# Altium PCB LC_S8.PcbDoc
Units mm, origin at the board's own origin, x right, y up, seen from the top; angles counter-clockwise.
Board outline 100 x 75 mm, 2 copper layers (F.Cu, B.Cu); 60 components, 58 nets, 170 pads, 4 vias.
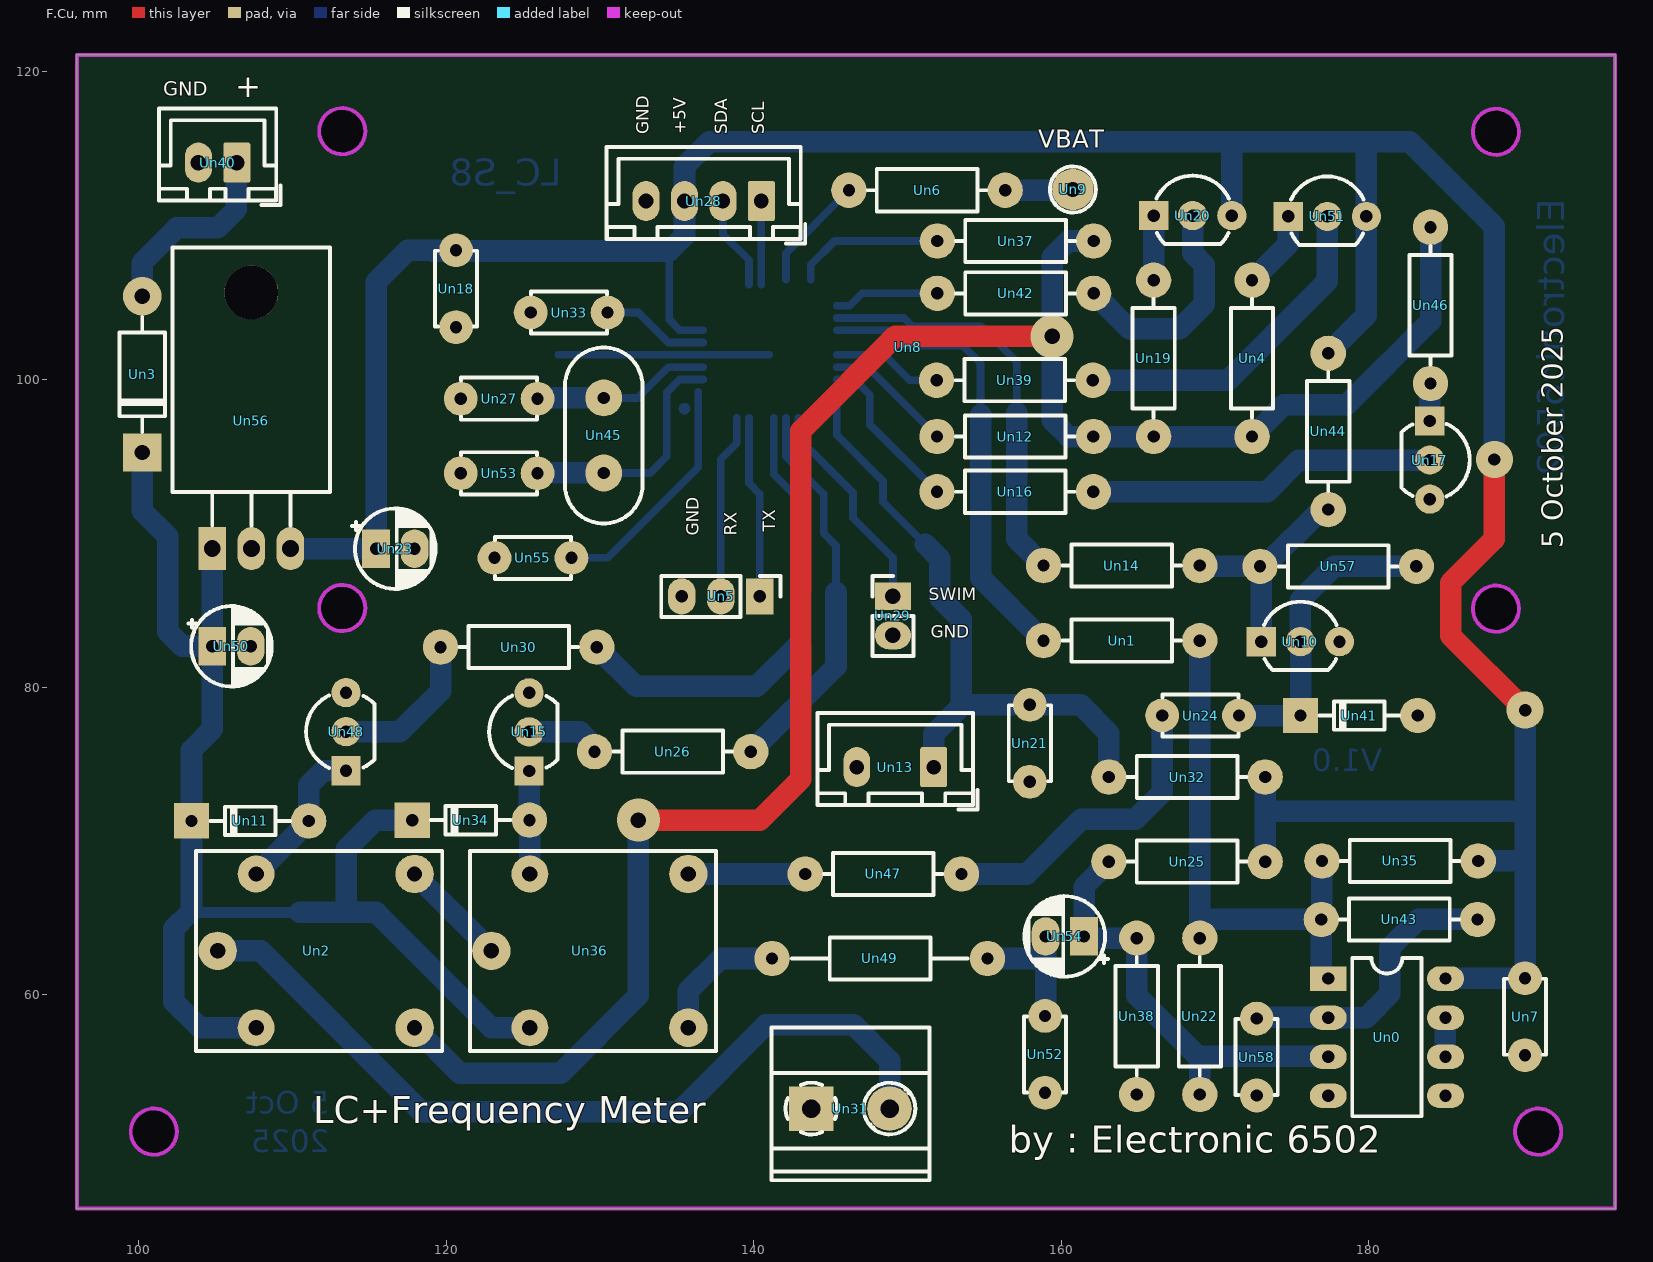
[diagram p0: F.Cu view]
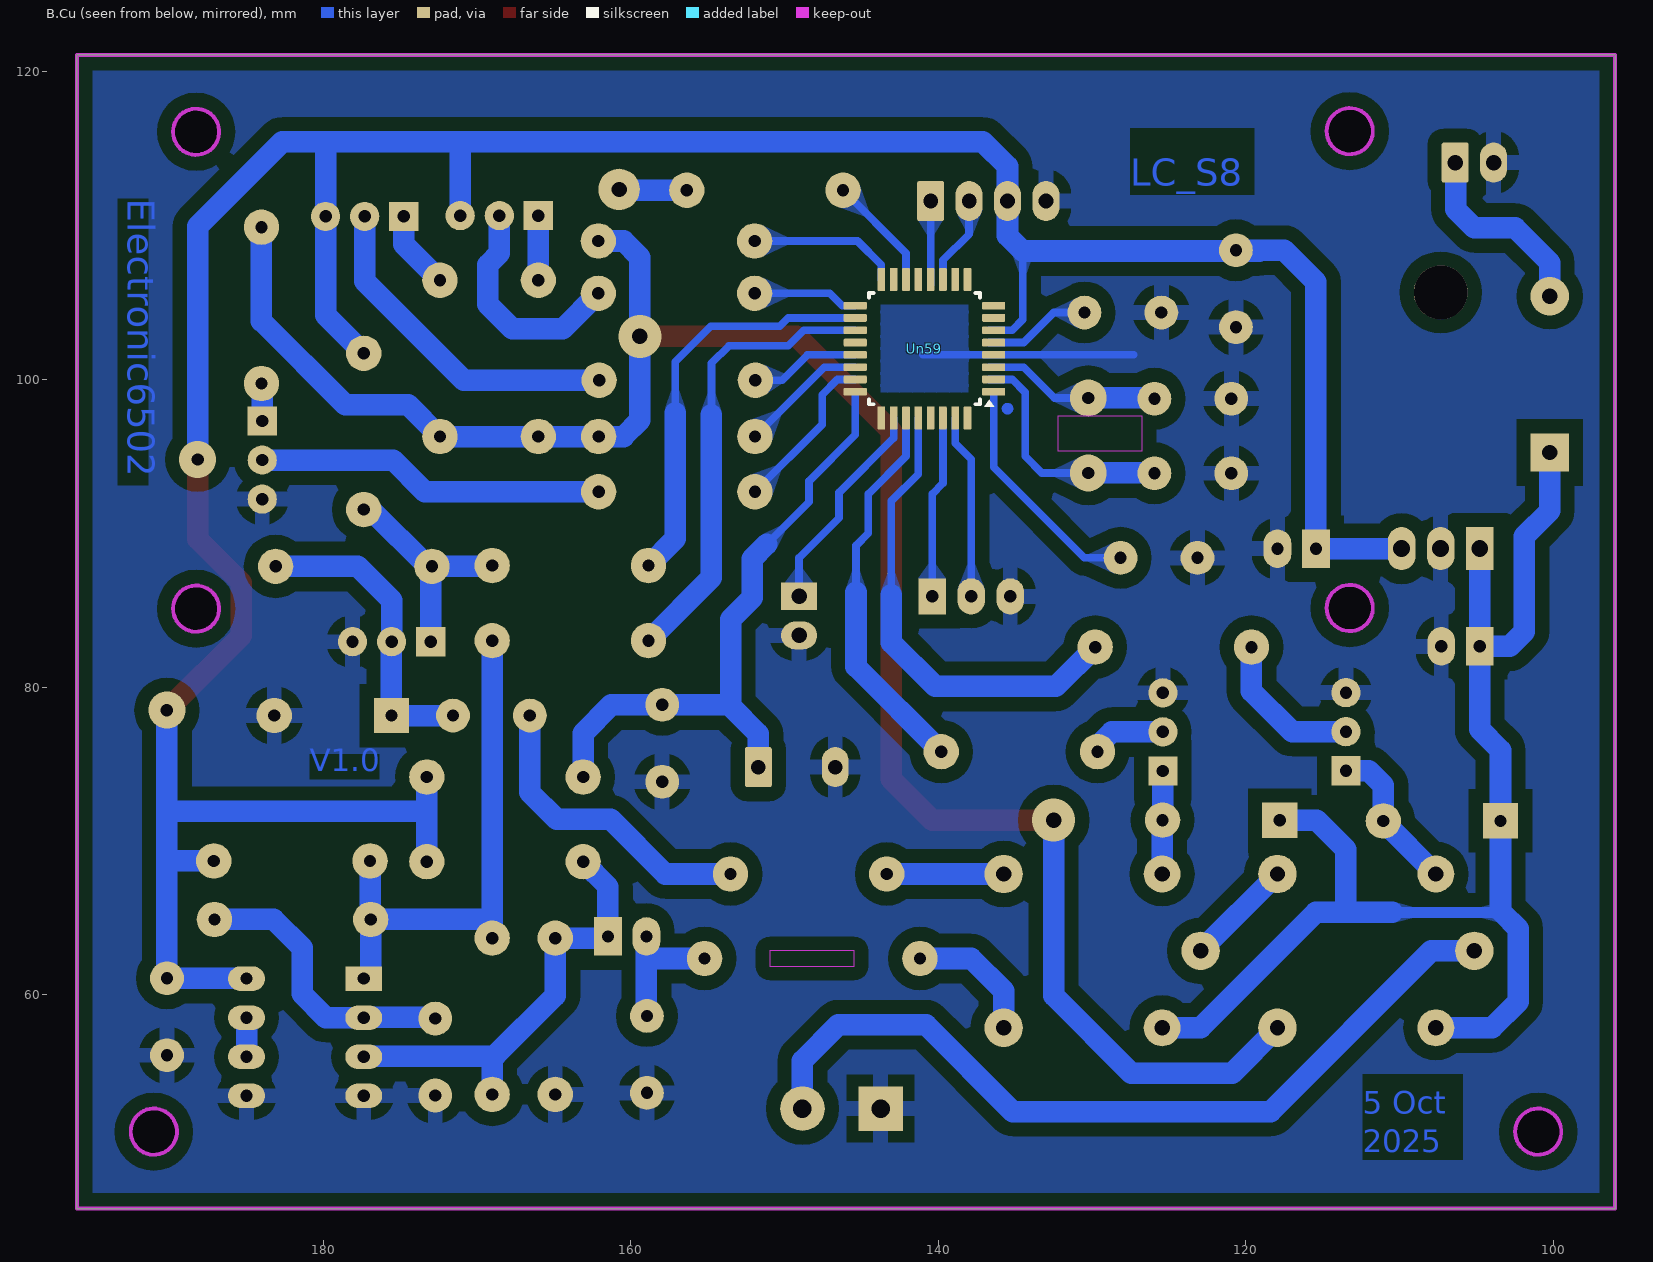
[diagram p1: B.Cu view, seen from below]

## Layer stack, top to bottom
F.Mask: solder mask 0.0102, Solder Resist, Dk 3.5
F.Cu: signal copper 0.0356
Dielectric 1: dielectric 0.32, FR-4, Dk 4.8
B.Cu: signal copper 0.0356
B.Mask: solder mask 0.0102, Solder Resist, Dk 3.5

## Board outline
96,121.1 96,46.1 196,46.1 196,121.1 96,121.1
cut-out: 101,49.593 101.294,49.622 101.577,49.707 101.837,49.847 102.066,50.034 102.253,50.263 102.393,50.523 102.478,50.806 102.507,51.1 102.478,51.394 102.393,51.677 102.253,51.937 102.066,52.166 101.837,52.353 101.577,52.493 101.294,52.578 101,52.607 100.706,52.578 100.423,52.493 100.163,52.353 99.934,52.166 99.747,51.937 99.607,51.677 99.522,51.394 99.493,51.1 99.522,50.806 99.607,50.523 99.747,50.263 99.934,50.034 100.163,49.847 100.423,49.707 100.706,49.622 101,49.593
cut-out: 114.558,115.406 114.643,115.564 114.729,115.847 114.758,116.141 114.729,116.436 114.643,116.718 114.504,116.979 114.316,117.208 114.088,117.395 113.985,117.45 113.827,117.534 113.544,117.62 113.25,117.649 112.956,117.62 112.673,117.534 112.412,117.395 112.184,117.208 111.996,116.979 111.942,116.877 111.857,116.718 111.771,116.436 111.742,116.141 111.771,115.847 111.857,115.564 111.996,115.304 112.184,115.075 112.412,114.888 112.515,114.833 112.673,114.748 112.956,114.663 113.25,114.634 113.544,114.663 113.827,114.748 114.088,114.888 114.316,115.075 114.504,115.304 114.558,115.406
cut-out: 191,49.593 191.294,49.622 191.577,49.707 191.837,49.847 192.066,50.034 192.253,50.263 192.393,50.523 192.478,50.806 192.507,51.1 192.478,51.394 192.393,51.677 192.253,51.937 192.066,52.166 191.837,52.353 191.577,52.493 191.294,52.578 191,52.607 190.706,52.578 190.423,52.493 190.163,52.353 189.934,52.166 189.747,51.937 189.607,51.677 189.522,51.394 189.493,51.1 189.522,50.806 189.607,50.523 189.747,50.263 189.934,50.034 190.163,49.847 190.423,49.707 190.706,49.622 191,49.593
cut-out: 189.558,84.365 189.643,84.523 189.728,84.806 189.757,85.1 189.728,85.394 189.643,85.677 189.503,85.937 189.316,86.166 189.087,86.353 188.985,86.408 188.827,86.493 188.544,86.578 188.25,86.607 187.956,86.578 187.673,86.493 187.413,86.353 187.184,86.166 186.997,85.937 186.942,85.835 186.857,85.677 186.772,85.394 186.743,85.1 186.772,84.806 186.857,84.523 186.997,84.263 187.184,84.034 187.413,83.847 187.515,83.792 187.673,83.707 187.956,83.622 188.25,83.593 188.544,83.622 188.827,83.707 189.087,83.847 189.316,84.034 189.503,84.263 189.558,84.365
cut-out: 189.558,115.365 189.643,115.523 189.728,115.806 189.757,116.1 189.728,116.394 189.643,116.677 189.503,116.937 189.316,117.166 189.087,117.353 188.985,117.408 188.827,117.493 188.544,117.578 188.25,117.607 187.956,117.578 187.673,117.493 187.413,117.353 187.184,117.166 186.997,116.937 186.942,116.835 186.857,116.677 186.772,116.394 186.743,116.1 186.772,115.806 186.857,115.523 186.997,115.263 187.184,115.034 187.413,114.847 187.515,114.792 187.673,114.707 187.956,114.622 188.25,114.593 188.544,114.622 188.827,114.707 189.087,114.847 189.316,115.034 189.503,115.263 189.558,115.365
cut-out: 114.558,84.406 114.643,84.564 114.729,84.847 114.758,85.141 114.729,85.436 114.643,85.718 114.504,85.979 114.316,86.208 114.088,86.395 113.985,86.45 113.827,86.534 113.544,86.62 113.25,86.649 112.956,86.62 112.673,86.534 112.412,86.395 112.184,86.208 111.996,85.979 111.942,85.877 111.857,85.718 111.771,85.436 111.742,85.141 111.771,84.847 111.857,84.564 111.996,84.304 112.184,84.075 112.412,83.888 112.515,83.833 112.673,83.748 112.956,83.663 113.25,83.634 113.544,83.663 113.827,83.748 114.088,83.888 114.316,84.075 114.504,84.304 114.558,84.406

## Design rules (kind name [scope] priority, off if disabled: settings)
Clearance "Clearence 0.9_Polygon" [InNamedPolygon('B.Cu-GND')] p1: gap=0.9 ignorepadtopadclearanceinfootprint=FALSE except(0: Fill-Text Poly-Text Region-Text)
ComponentClearance [All] p1: gap=0 collisioncheckmode=3 verticalgap=0 showdistances=FALSE
MinimumSolderMaskSliver [All] p1: minsoldermaskwidth=0
PolygonConnect Polygon_B.Cu-Net-(U2-PC7)-1_ConnectDirect [IsNamedPolygon('B.Cu-Net-(U2-PC7)-1')] p1: connectstyle=Direct reliefconductorwidth=0.254 reliefentries=4 polygonreliefangle="90 Angle" airgapwidth=0.254
PolygonConnect Polygon_B.Cu-GND_ConnectDirect [IsNamedPolygon('B.Cu-GND') vs IsVia] p2: connectstyle=Direct reliefconductorwidth=0.254 reliefentries=4 polygonreliefangle="90 Angle" airgapwidth=0.254
PolygonConnect Polygon_B.Cu-GND_ConnectRelief45 [IsNamedPolygon('B.Cu-GND') vs (IsThruPin or IsSMTPin) and (PadShape_AllLayers = 'Round')] p3: connectstyle=Relief reliefconductorwidth=1 reliefentries=4 polygonreliefangle="90 Angle" airgapwidth=0.75
PolygonConnect Polygon_B.Cu-GND_ConnectRelief90 [IsNamedPolygon('B.Cu-GND') vs (IsThruPin or IsSMTPin) and (PadShape_AllLayers <> 'Round')] p4: connectstyle=Relief reliefconductorwidth=1 reliefentries=4 polygonreliefangle="90 Angle" airgapwidth=0.75
PolygonConnect Polygon_B.Cu-Net-(U2-VCAP)_ConnectDirect [IsNamedPolygon('B.Cu-Net-(U2-VCAP)')] p5: connectstyle=Direct reliefconductorwidth=0.254 reliefentries=4 polygonreliefangle="90 Angle" airgapwidth=0.254
PolygonConnect Polygon_B.Cu-CAP_SLOW_CHG_ConnectDirect [IsNamedPolygon('B.Cu-CAP_SLOW_CHG')] p6: connectstyle=Direct reliefconductorwidth=0.254 reliefentries=4 polygonreliefangle="90 Angle" airgapwidth=0.254
PolygonConnect Polygon_B.Cu-+9V-5_ConnectDirect [IsNamedPolygon('B.Cu-+9V-5')] p7: connectstyle=Direct reliefconductorwidth=0.254 reliefentries=4 polygonreliefangle="90 Angle" airgapwidth=0.254
PolygonConnect Polygon_B.Cu-Cx_ADC_ConnectDirect [IsNamedPolygon('B.Cu-Cx_ADC')] p8: connectstyle=Direct reliefconductorwidth=0.254 reliefentries=4 polygonreliefangle="90 Angle" airgapwidth=0.254
PolygonConnect Polygon_B.Cu-RL1-1_ConnectDirect [IsNamedPolygon('B.Cu-RL1-1')] p9: connectstyle=Direct reliefconductorwidth=0.254 reliefentries=4 polygonreliefangle="90 Angle" airgapwidth=0.254
PolygonConnect Polygon_B.Cu-+9V-4_ConnectDirect [IsNamedPolygon('B.Cu-+9V-4')] p10: connectstyle=Direct reliefconductorwidth=0.254 reliefentries=4 polygonreliefangle="90 Angle" airgapwidth=0.254
PolygonConnect Polygon_B.Cu-Net-(U2-PA2)_ConnectDirect [IsNamedPolygon('B.Cu-Net-(U2-PA2)')] p11: connectstyle=Direct reliefconductorwidth=0.254 reliefentries=4 polygonreliefangle="90 Angle" airgapwidth=0.254
PolygonConnect Polygon_B.Cu-+9V-3_ConnectDirect [IsNamedPolygon('B.Cu-+9V-3')] p12: connectstyle=Direct reliefconductorwidth=0.254 reliefentries=4 polygonreliefangle="90 Angle" airgapwidth=0.254
PolygonConnect Polygon_B.Cu-+9V-2_ConnectDirect [IsNamedPolygon('B.Cu-+9V-2')] p13: connectstyle=Direct reliefconductorwidth=0.254 reliefentries=4 polygonreliefangle="90 Angle" airgapwidth=0.254
PolygonConnect Polygon_B.Cu-~{CAP_FAST_CHG}_ConnectDirect [IsNamedPolygon('B.Cu-~{CAP_FAST_CHG}')] p14: connectstyle=Direct reliefconductorwidth=0.254 reliefentries=4 polygonreliefangle="90 Angle" airgapwidth=0.254
PolygonConnect Polygon_B.Cu-UART_RX_ConnectDirect [IsNamedPolygon('B.Cu-UART_RX')] p15: connectstyle=Direct reliefconductorwidth=0.254 reliefentries=4 polygonreliefangle="90 Angle" airgapwidth=0.254
PolygonConnect Polygon_B.Cu-RL1_ConnectDirect [IsNamedPolygon('B.Cu-RL1')] p16: connectstyle=Direct reliefconductorwidth=0.254 reliefentries=4 polygonreliefangle="90 Angle" airgapwidth=0.254
PolygonConnect Polygon_B.Cu-Lx_OUT-1_ConnectDirect [IsNamedPolygon('B.Cu-Lx_OUT-1')] p17: connectstyle=Direct reliefconductorwidth=0.254 reliefentries=4 polygonreliefangle="90 Angle" airgapwidth=0.254
PolygonConnect Polygon_B.Cu-+5V-3_ConnectDirect [IsNamedPolygon('B.Cu-+5V-3')] p18: connectstyle=Direct reliefconductorwidth=0.254 reliefentries=4 polygonreliefangle="90 Angle" airgapwidth=0.254
PolygonConnect Polygon_B.Cu-~{CAP_M_CHG}_ConnectDirect [IsNamedPolygon('B.Cu-~{CAP_M_CHG}')] p19: connectstyle=Direct reliefconductorwidth=0.254 reliefentries=4 polygonreliefangle="90 Angle" airgapwidth=0.254
PolygonConnect Polygon_B.Cu-F_OUT_ConnectDirect [IsNamedPolygon('B.Cu-F_OUT')] p20: connectstyle=Direct reliefconductorwidth=0.254 reliefentries=4 polygonreliefangle="90 Angle" airgapwidth=0.254
PolygonConnect Polygon_B.Cu-RL2-1_ConnectDirect [IsNamedPolygon('B.Cu-RL2-1')] p21: connectstyle=Direct reliefconductorwidth=0.254 reliefentries=4 polygonreliefangle="90 Angle" airgapwidth=0.254
PolygonConnect Polygon_B.Cu-CAP_DISCHARGE_ConnectDirect [IsNamedPolygon('B.Cu-CAP_DISCHARGE')] p22: connectstyle=Direct reliefconductorwidth=0.254 reliefentries=4 polygonreliefangle="90 Angle" airgapwidth=0.254
PolygonConnect Polygon_B.Cu-RL2_ConnectDirect [IsNamedPolygon('B.Cu-RL2')] p23: connectstyle=Direct reliefconductorwidth=0.254 reliefentries=4 polygonreliefangle="90 Angle" airgapwidth=0.254
PolygonConnect Polygon_B.Cu-+5V-2_ConnectDirect [IsNamedPolygon('B.Cu-+5V-2')] p24: connectstyle=Direct reliefconductorwidth=0.254 reliefentries=4 polygonreliefangle="90 Angle" airgapwidth=0.254
PolygonConnect Polygon_B.Cu-+9V-1_ConnectDirect [IsNamedPolygon('B.Cu-+9V-1')] p25: connectstyle=Direct reliefconductorwidth=0.254 reliefentries=4 polygonreliefangle="90 Angle" airgapwidth=0.254
PolygonConnect Polygon_B.Cu-Net-(U2-PC7)_ConnectDirect [IsNamedPolygon('B.Cu-Net-(U2-PC7)')] p26: connectstyle=Direct reliefconductorwidth=0.254 reliefentries=4 polygonreliefangle="90 Angle" airgapwidth=0.254
PolygonConnect Polygon_B.Cu-SWIM_ConnectDirect [IsNamedPolygon('B.Cu-SWIM')] p27: connectstyle=Direct reliefconductorwidth=0.254 reliefentries=4 polygonreliefangle="90 Angle" airgapwidth=0.254
PolygonConnect Polygon_B.Cu-+9V_ConnectDirect [IsNamedPolygon('B.Cu-+9V')] p28: connectstyle=Direct reliefconductorwidth=0.254 reliefentries=4 polygonreliefangle="90 Angle" airgapwidth=0.254
PolygonConnect Polygon_B.Cu-+5V-1_ConnectDirect [IsNamedPolygon('B.Cu-+5V-1')] p29: connectstyle=Direct reliefconductorwidth=0.254 reliefentries=4 polygonreliefangle="90 Angle" airgapwidth=0.254
PolygonConnect Polygon_B.Cu-+5V_ConnectDirect [IsNamedPolygon('B.Cu-+5V')] p30: connectstyle=Direct reliefconductorwidth=0.254 reliefentries=4 polygonreliefangle="90 Angle" airgapwidth=0.254
PolygonConnect Polygon_B.Cu-Net-(U2-NRST)_ConnectDirect [IsNamedPolygon('B.Cu-Net-(U2-NRST)')] p31: connectstyle=Direct reliefconductorwidth=0.254 reliefentries=4 polygonreliefangle="90 Angle" airgapwidth=0.254
PolygonConnect Polygon_B.Cu-LCD_SCL_ConnectDirect [IsNamedPolygon('B.Cu-LCD_SCL')] p32: connectstyle=Direct reliefconductorwidth=0.254 reliefentries=4 polygonreliefangle="90 Angle" airgapwidth=0.254
PolygonConnect Polygon_B.Cu-Lx_OUT_ConnectDirect [IsNamedPolygon('B.Cu-Lx_OUT')] p33: connectstyle=Direct reliefconductorwidth=0.254 reliefentries=4 polygonreliefangle="90 Angle" airgapwidth=0.254
PolygonConnect Polygon_B.Cu-Net-(U2-PB2)_ConnectDirect [IsNamedPolygon('B.Cu-Net-(U2-PB2)')] p34: connectstyle=Direct reliefconductorwidth=0.254 reliefentries=4 polygonreliefangle="90 Angle" airgapwidth=0.254
PolygonConnect Polygon_B.Cu-UART_TX_ConnectDirect [IsNamedPolygon('B.Cu-UART_TX')] p35: connectstyle=Direct reliefconductorwidth=0.254 reliefentries=4 polygonreliefangle="90 Angle" airgapwidth=0.254
PolygonConnect Polygon_B.Cu-Net-(U2-PA1)_ConnectDirect [IsNamedPolygon('B.Cu-Net-(U2-PA1)')] p36: connectstyle=Direct reliefconductorwidth=0.254 reliefentries=4 polygonreliefangle="90 Angle" airgapwidth=0.254
PolygonConnect Polygon_B.Cu-LCD_SDA_ConnectDirect [IsNamedPolygon('B.Cu-LCD_SDA')] p37: connectstyle=Direct reliefconductorwidth=0.254 reliefentries=4 polygonreliefangle="90 Angle" airgapwidth=0.254
RoutingVias [All] p1: holewidth=0.711 width=1.27 viastyle="Through Hole" minholewidth=0.711 minwidth=1.27 maxholewidth=0.711 maxwidth=1.27
SilkToSilkClearance [All] p1: silktosilkclearance=0
SilkToSolderMaskClearance [IsPad] p1: minsilkscreentomaskgap=0 clearancetoexposedcopper=TRUE
SolderMaskExpansion [All] p1: expansion=0.102 istentingtop=FALSE
Width [All] p1: maxlimit=10 minlimit=0.254 preferedwidth=0.254 minimp=50.000000 maximp=50.000000 favimp=50.000000
26 further rules are at their usual default settings.

## Components (designator, comment, footprint, x,y, rotation, side; value= is the part's Value field where it differs from the comment)
Un0 "Comment" DIP-8_W7.62mm_LongPads 177.35,61.05 r0 top value=LM393
Un1 "Comment" R_TH_0.25W 169,83.02 r180 top value=1K
Un2 "Comment" Relay_T78 111.75,62.85 r0 top value=12V
Un3 "Comment" D_DO-41_H 100.25,95.25 r90 top value=1N5819
Un4 "Comment" R_TH_0.25W 172.4,106.45 r270 top value=10K
Un5 "Comment" PinHeader_1x03_P2.54_V 140.4,85.9 r270 top value=UART
Un6 "Comment" R_TH_0.25W 156.35,112.3 r180 top value=10K
Un7 "Comment" C_Disc_P5.00mm 190.143,61.07 r270 top value=100nF
Un8 "Comment" LCD1602_Holes 150,102.1 r0 top value=LCD_Holes
Un9 "Comment" Pad_01x01_0.8x2.7 160.75,112.35 r90 top value=V_BATT
Un10 "Comment" TO-92_Wide 173,82.95 r0 top value=BC547
Un11 "Comment" D_DO-34_P7.62mm_Horizontal 103.45,71.3 r0 top value=1N4148
Un12 "Comment" R_TH_0.25W 162.08,96.287 r180 top value=1M
Un13 "Comment" CONN_XH_01x02_3 151.7,74.8 r180 top value=MODE
Un14 "Comment" R_TH_0.25W 169,87.9 r180 top value=1K
Un15 "Comment" TO-92_Wide 125.4,74.55 r90 top value=BC337
Un16 "Comment" R_TH_0.25W 162.08,92.7 r180 top value=4K7
Un17 "Comment" TO-92_Wide 183.95,97.3 r270 top value=BC337
Un18 "Comment" C_Disc_P5.00mm 120.65,108.4 r270 top value=100nF
Un19 "Comment" R_TH_0.25W 166,106.45 r270 top value=100R
Un20 "Comment" TO-92_Wide 166,110.65 r0 top value=BC327
Un21 "Comment" C_Disc_P5.00mm 157.95,78.85 r270 top value=10nF
Un22 "Comment" R_TH_0.25W 169,53.52 r90 top value=10K
Un23 "Comment" CP_Radial_D5.0mm_P2.50mm_LongPad 115.45,89 r0 top value=100uF
Un24 "Comment" C_Disc_P5.00mm 166.55,78.15 r0 top value=100nF
Un25 "Comment" R_TH_0.25W 173.25,68.65 r180 top value=10K
Un26 "Comment" R_TH_0.25W 129.65,75.8 r0 top value=4K7
Un27 "Comment" C_Disc_P5.00mm 125.95,98.75 r180 top value=22pF
Un28 "Comment" CONN_XH_01x04 140.5,111.6 r180 top value=LCD
Un29 "Comment" PinHeader_1x02_P2.54_V 149.05,85.9 r0 top value=SWIM
Un30 "Comment" R_TH_0.25W 129.8,82.6 r180 top value=4K7
Un31 "Comment" Terminal_Phoenix_01x02 146.339,52.691 r0 top value=Target
Un32 "Comment" R_TH_0.25W 173.25,74.15 r180 top value=10K
Un33 "Comment" C_Disc_P5.00mm 130.5,104.35 r180 top value=1uF
Un34 "Comment" D_DO-34_P7.62mm_Horizontal 117.8,71.35 r0 top value=1N4148
Un35 "Comment" R_TH_0.25W 187.1,68.7 r180 top value=1K
Un36 "Comment" Relay_T78 129.55,62.85 r0 top value=12V
Un37 "Comment" R_TH_0.25W 162.1,109 r180 top value=10K
Un38 "Comment" R_TH_0.25W 164.9,63.68 r270 top value=10K
Un39 "Comment" R_TH_0.25W 162.05,99.95 r180 top value=10K
Un40 "Comment" CONN_XH_01x02 106.4,114.1 r180 top value=9-12V
Un41 "Comment" D_DO-34_P7.62mm_Horizontal 175.55,78.15 r0 top value=1N4148
Un42 "Comment" R_TH_0.25W 162.1,105.6 r180 top value=4K7
Un43 "Comment" R_TH_0.25W 187.06,64.895 r180 top value=1M
Un44 "Comment" R_TH_0.25W 177.35,101.7 r270 top value=10K
Un45 "Comment" Crystal_HC49_V_Short 130.25,98.8 r270 top value=16MHz
Un46 "Comment" R_TH_0.25W 184,109.9 r270 top value=100R
Un47 "Comment" R_TH_0.25W 143.35,67.85 r0 top value=10K
Un48 "Comment" TO-92_Wide 113.5,74.56 r90 top value=BC337
Un49 "Comment" R_TH_0.25W_P14 140.594,62.357 r0 top value=100uH
Un50 "Comment" CP_Radial_D5.0mm_P2.50mm_LongPad 104.8,82.65 r0 top value=100uF
Un51 "Comment" TO-92_Wide 174.75,110.6 r0 top value=BC557
Un52 "Comment" C_Disc_P5.00mm 158.942,58.62 r270 top value=4n7
Un53 "Comment" C_Disc_P5.00mm 125.95,93.9 r180 top value=22pF
Un54 "Comment" CP_Radial_D5.0mm_P2.50mm_LongPad 161.475,63.79 r180 top value=10uF
Un55 "Comment" C_Disc_P5.00mm 128.15,88.4 r180 top value=10nF
Un56 "Comment" TO-220_H 104.8,89 r0 top value=L7805
Un57 "Comment" R_TH_0.25W 183.08,87.85 r180 top value=1M
Un58 "Comment" C_Disc_P5.00mm 172.7,58.45 r270 top value=100nF
Un59 "Comment" LQFP-32_7x7mm_P0.8mm_LongPad 140.9,102 r180 bottom value=STM8S003K3T

## Footprints (in the part's own frame and the unit in brackets; to place one, negate y for a bottom-side part, rotate by r counter-clockwise, add the part's x,y. Pads: shape width x height; smd on the part's side, far side on the other; paste and mask are expansions set on the pad)
C_Disc_P5.00mm [mm]
  round 2.2 hole 0.8 paste-2.2 mask+0: 1(0,0) 2(5,0)
  silkscreen extent 0.03,-1.37 4.97,1.37
CONN_XH_01x02 [mm]
  rrect15% 1.75x2.6 hole 1 paste-2.6 mask+0: 1(0,0)
  rrect100% 1.75x2.6 hole 1 paste-2.6 mask+0: 2(2.5,0)
  silkscreen extent -2.85,-3.51 5.06,2.75
CONN_XH_01x02_3 [mm]
  rrect15% 1.75x2.6 hole 0.95 paste-2.6 mask+0: 1(0,0)
  rrect100% 1.75x2.6 hole 0.95 paste-2.6 mask+0: 2(5,0)
  silkscreen extent -2.85,-3.51 7.56,2.75
CONN_XH_01x04 [mm]
  rrect15% 1.75x2.6 hole 0.95 paste-2.6 mask+0: 1(0,0)
  rrect100% 1.75x2.6 hole 0.95 paste-2.6 mask+0: 2(2.5,0) 3(5,0) 4(7.5,0)
  silkscreen extent -2.85,-3.51 10.06,2.75
CP_Radial_D5.0mm_P2.50mm_LongPad [mm]
  rect 1.8x2.5 hole 0.8 paste-2.5 mask+0: 1(0,0)
  rrect100% 1.8x2.5 hole 0.8 paste-2.5 mask+0: 2(2.5,0)
  silkscreen extent -1.55,-2.62 3.87,2.62
Crystal_HC49_V_Short [mm]
  round 2.4 hole 0.8 paste-2.4 mask+0: 1(0,0) 2(4.88,0)
  silkscreen extent -3.28,-2.52 8.16,2.52
D_DO-34_P7.62mm_Horizontal [mm]
  rect 2.3x2.3 hole 0.8 paste-2.3 mask+0: 1(0,0)
  round 2.3 hole 0.8 paste-2.3 mask+0: 2(7.62,0)
  silkscreen extent 1.22,-0.92 6.4,0.92
D_DO-41_H [mm]
  rect 2.5x2.5 hole 1 paste-2.5 mask+0: 1(0,0)
  round 2.5 hole 1 paste-2.5 mask+0: 2(10.16,0)
  silkscreen extent 1.34,-1.47 8.82,1.47
DIP-8_W7.62mm_LongPads [mm]
  rect 2.4x1.6 hole 0.8 paste-2.4 mask+0: 1(0,0)
  rrect100% 2.4x1.6 hole 0.8 paste-2.4 mask+0: 2(0,-2.54) 3(0,-5.08) 4(0,-7.62) 5(7.62,-7.62) 6(7.62,-5.08) 7(7.62,-2.54) 8(7.62,0)
  silkscreen extent 1.56,-8.95 6.06,1.33
LCD1602_Holes [mm]
LQFP-32_7x7mm_P0.8mm_LongPad [mm]
  rrect25% 1.5x0.5 smd mask+0: 1(4.5,-2.8) 2(4.5,-2) 3(4.5,-1.2) 4(4.5,-0.4) 5(4.5,0.4) 6(4.5,1.2) 7(4.5,2) 8(4.5,2.8) 17(-4.5,2.8) 18(-4.5,2) 19(-4.5,1.2) 20(-4.5,0.4) 21(-4.5,-0.4) 22(-4.5,-1.2) 23(-4.5,-2) 24(-4.5,-2.8)
  rrect25% 0.5x1.5 smd mask+0: 9(2.8,4.5) 10(2,4.5) 11(1.2,4.5) 12(0.4,4.5) 13(-0.4,4.5) 14(-1.2,4.5) 15(-2,4.5) 16(-2.8,4.5) 25(-2.8,-4.5) 26(-2,-4.5) 27(-1.2,-4.5) 28(-0.4,-4.5) 29(0.4,-4.5) 30(1.2,-4.5) 31(2,-4.5) 32(2.8,-4.5)
  silkscreen extent -3.61,-3.78 4.55,3.61
Pad_01x01_0.8x2.7 [mm]
  round 2.7 hole 1 paste-2.7 mask+0: 1(0,0)
  silkscreen extent -1.5,-1.5 1.5,1.5
PinHeader_1x02_P2.54_V [mm]
  rect 2.35x1.8 hole 1 paste-2.35 mask+0: 1(0,0)
  rrect100% 2.35x1.8 hole 1 paste-2.35 mask+0: 2(0,-2.54)
  silkscreen extent -1.33,-3.87 1.33,1.33
PinHeader_1x03_P2.54_V [mm]
  rect 2.35x1.8 hole 0.8 paste-2.35 mask+0: 1(0,0)
  rrect100% 2.35x1.8 hole 0.8 paste-2.35 mask+0: 2(0,-2.54) 3(0,-5.08)
  silkscreen extent -1.33,-6.41 1.33,1.33
R_TH_0.25W [mm]
  round 2.3 hole 0.8 paste-2.3 mask+0: 1(0,0) 2(10.16,0)
  silkscreen extent 1.22,-1.37 8.94,1.37
R_TH_0.25W_P14 [mm]
  round 2.3 hole 0.8 paste-2.3 mask+0: 1(0.6,0) 2(14.6,0)
  silkscreen extent 1.9,-1.37 13.3,1.37
Relay_T78 [mm]
  round 2.5 hole 1 paste-2.5 mask+0: 1(-6.6,0) 3(6.2,-5) 4(6.2,5)
  round 2.4 hole 1 paste-2.4 mask+0: 2(-4.1,-5) 5(-4.1,5)
  silkscreen extent -8,-6.5 8,6.5
Terminal_Phoenix_01x02 [mm]
  rect 2.9x2.9 hole 1.2 paste-2.9 mask+0: 1(-2.589,-0.092)
  round 2.9 hole 1.2 paste-2.9 mask+0: 2(2.491,-0.092)
  silkscreen extent -5.19,-4.75 5.09,5.17
TO-92_Wide [mm]
  rect 1.9x1.9 hole 0.8 paste-1.9 mask+0: 1(0,0)
  round 1.9 hole 0.8 paste-1.9 mask+0: 2(2.54,0) 3(5.08,0)
  silkscreen extent 0.18,-1.85 4.9,2.6
TO-220_H [mm]
  rect 1.8x2.8 hole 1.1 paste-2.8 mask+0: 1(0,0)
  rrect100% 1.8x2.8 hole 1.1 paste-2.8 mask+0: 2(2.54,0) 3(5.08,0)
  rrect100% 3.5x3.5 hole 3.5 paste-3.5 mask+0: Un1(2.54,16.66)
  silkscreen extent -2.58,1.5 7.66,19.58

## Part data
Un0: library part DIP-8_W7.62mm_LongPads, "8-lead though-hole mounted DIP package, row spacing 7.62 mm (300 mils), LongPads", Reference=U3, Footprint=Package_DIP:DIP-8_W7.62mm_LongPads, Datasheet=http://www.ti.com/lit/ds/symlink/lm393.pdf, Description="Low-Power, Low-Offset Voltage, Dual Comparators, DIP-8/SOIC-8/TO-99-8", ki_fp_filters="SOIC*3.9x4.9mm*P1.27mm* DIP*W7.62mm* SOP*5.28x5.23mm*P1.27mm* VSSOP*3.0x3.0mm*P0.65mm* TSSOP*4.4x3mm*P0.65mm*"
Un1 Un4 Un6 Un12 Un14 Un16 Un19 Un22 Un25 Un26 Un30 Un32 Un35 Un37 Un38 Un39 Un42 Un43 Un44 Un46 Un47 Un57: library part R_TH_0.25W, "Resistor, Axial_DIN0207 series, Axial, Horizontal, pin pitch=10.16mm, 0.25W = 1/4W, length*diameter=6.3*2.5mm^2, http://cdn-reichelt.de/documents/datenblatt/B400/1_4W%23YAG.pdf", Footprint=User6502:R_TH_0.25W, Description=Resistor, ki_fp_filters=R_*
  Un1: Reference=R17
  Un4: Reference=R12
  Un6: Reference=R7
  Un12: Reference=R19
  Un14: Reference=R3
  Un16: Reference=R22
  Un19: Reference=R13
  Un22: Reference=R14
  Un25: Reference=R10
  Un26: Reference=R5
  Un30: Reference=R6
  Un32: Reference=R15
  Un35: Reference=R11
  Un37: Reference=R16
  Un38: Reference=R20
  Un39: Reference=R9
  Un42: Reference=R8
  Un43: Reference=R21
  Un44: Reference=R1
  Un46: Reference=R18
  Un47: Reference=R4
  Un57: Reference=R2
Un2 Un36: library part Relay_T78, Footprint=User6502:Relay_T78, Description="Monostable Relay SPDT, EN50005", ki_fp_filters="Relay_T78 SRD"
  Un2: Reference=REL2
  Un36: Reference=REL1
Un3: library part D_DO-41_H, "Diode, DO-41_SOD81 series, Axial, Horizontal, pin pitch=10.16mm, , length*diameter=5.2*2.7mm^2, , http://www.diodes.com/_files/packages/DO-41%20(Plastic).pdf", Reference=D1, Footprint=User6502:D_DO-41_H, Datasheet=http://www.vishay.com/docs/88525/1n5817.pdf, Description="40V 1A Schottky Barrier Rectifier Diode, DO-41", ki_fp_filters=D*DO?41*
Un5: library part PinHeader_1x03_P2.54_V, "Through hole straight pin header, 1x03, 2.54mm pitch, single row", Reference=J6, Footprint=User6502:PinHeader_1x03_P2.54_V, Description="Generic connector, single row, 01x03, script generated (kicad-library-utils/schlib/autogen/connector/)", ki_fp_filters=Connector*:*_1x??_*
Un7 Un18 Un21 Un24 Un27 Un33 Un52 Un53 Un55 Un58: library part C_Disc_P5.00mm, "C, Disc series, Radial, pin pitch=5.00mm, , diameter*width=4.7*2.5mm^2, Capacitor, http://www.vishay.com/docs/45233/krseries.pdf", Footprint=User6502:C_Disc_P5.00mm, Description="Unpolarized capacitor", ki_fp_filters=C_*
  Un7: Reference=C5
  Un18: Reference=C3
  Un21: Reference=C10
  Un24: Reference=C1
  Un27: Reference=C6
  Un33: Reference=C12
  Un52: Reference=C9
  Un53: Reference=C7
  Un55: Reference=C11
  Un58: Reference=C13
Un8: library part LCD1602_Holes, Reference=H1, Footprint=User6502:LCD1602_Holes, Description="Mounting Hole without connection", ki_fp_filters=MountingHole*
Un9: library part Pad_01x01_0.8x2.7, Reference=J3, Footprint=User6502:Pad_01x01_0.8x2.7, Description="Generic connector, single row, 01x01, script generated (kicad-library-utils/schlib/autogen/connector/)", ki_fp_filters=Connector*:*_1x??_*
Un10 Un15 Un17 Un20 Un48 Un51: library part TO-92_Wide, "TO-92 leads in-line, wide, drill 0.75mm (see NXP sot054_po.pdf)", Footprint=User6502:TO-92_Wide, ki_fp_filters=TO?92*
  Un10: Reference=Q1, Datasheet=https://www.onsemi.com/pub/Collateral/BC550-D.pdf, Description="0.1A Ic, 45V Vce, Small Signal NPN Transistor, TO-92"
  Un15: Reference=Q2, Datasheet=https://diotec.com/tl_files/diotec/files/pdf/datasheets/bc337.pdf, Description="0.8A Ic, 45V Vce, NPN Transistor, TO-92"
  Un17: Reference=Q6, Datasheet=https://diotec.com/tl_files/diotec/files/pdf/datasheets/bc337.pdf, Description="0.8A Ic, 45V Vce, NPN Transistor, TO-92"
  Un20: Reference=Q5, Datasheet=http://www.onsemi.com/pub_link/Collateral/BC327-D.PDF, Description="0.8A Ic, 45V Vce, PNP Transistor, TO-92"
  Un48: Reference=Q3, Datasheet=https://diotec.com/tl_files/diotec/files/pdf/datasheets/bc337.pdf, Description="0.8A Ic, 45V Vce, NPN Transistor, TO-92"
  Un51: Reference=Q4, Datasheet=https://www.onsemi.com/pub/Collateral/BC556BTA-D.pdf, Description="0.1A Ic, 45V Vce, PNP Small Signal Transistor, TO-92"
Un11 Un34 Un41: library part D_DO-34_P7.62mm_Horizontal, "Diode, DO-34_SOD68 series, Axial, Horizontal, pin pitch=7.62mm, , length*diameter=3.04*1.6mm^2, , https://www.nxp.com/docs/en/data-sheet/KTY83_SER.pdf", Footprint=User6502:D_DO-34_P7.62mm_Horizontal, Datasheet=https://assets.nexperia.com/documents/data-sheet/1N4148_1N4448.pdf, Description="100V 0.15A standard switching diode, DO-35", Sim.Device=D, Sim.Pins="1=K 2=A", ki_fp_filters=D*DO?35*
  Un11: Reference=D4
  Un34: Reference=D2
  Un41: Reference=D3
Un13: library part CONN_XH_01x02_3, "JST XH series connector, B3B-XH-A (http://www.jst-mfg.com/product/pdf/eng/eXH.pdf), generated with kicad-footprint-generator", Reference=SW1, Footprint=User6502:CONN_XH_01x02_3, Description="Push button switch, generic, two pins"
Un23 Un50 Un54: library part CP_Radial_D5.0mm_P2.50mm_LongPad, "CP, Radial series, Radial, pin pitch=2.50mm, , diameter=5mm, Electrolytic Capacitor", Footprint=User6502:CP_Radial_D5.0mm_P2.50mm_LongPad, ki_fp_filters=CP_*
  Un23: Reference=C4, Description=16V
  Un50: Reference=C2, Description=16V
  Un54: Reference=C8, Description=50V
Un28: library part CONN_XH_01x04, "JST XH series connector, B4B-XH-A (http://www.jst-mfg.com/product/pdf/eng/eXH.pdf), generated with kicad-footprint-generator", Reference=J5, Footprint=User6502:CONN_XH_01x04, Description="Generic connector, single row, 01x04, script generated (kicad-library-utils/schlib/autogen/connector/)", ki_fp_filters=Connector*:*_1x??_*
Un29: library part PinHeader_1x02_P2.54_V, "Through hole straight pin header, 1x02, 2.54mm pitch, single row", Reference=J4, Footprint=User6502:PinHeader_1x02_P2.54_V, Description="Generic connector, single row, 01x02, script generated (kicad-library-utils/schlib/autogen/connector/)", ki_fp_filters=Connector*:*_1x??_*
Un31: library part Terminal_Phoenix_01x02, Reference=J2, Footprint=User6502:Terminal_Phoenix_01x02, Description="Generic screw terminal, single row, 01x02, script generated (kicad-library-utils/schlib/autogen/connector/)", ki_fp_filters=TerminalBlock*:*
Un40: library part CONN_XH_01x02, "JST XH series connector, B2B-XH-A (http://www.jst-mfg.com/product/pdf/eng/eXH.pdf), generated with kicad-footprint-generator", Reference=J1, Footprint=User6502:CONN_XH_01x02, Description=SUPPLY, ki_fp_filters=Connector*:*_1x??_*
Un45: library part Crystal_HC49_V_Short, "Crystal THT HC-49-4H http://5hertz.com/pdfs/04404_D.pdf", Reference=Y1, Footprint=User6502:Crystal_HC49_V_Short, Description="Two pin crystal", ki_fp_filters=Crystal*
Un49: library part R_TH_0.25W_P14, "Resistor, Axial_DIN0207 series, Axial, Horizontal, pin pitch=15.24mm, 0.25W = 1/4W, length*diameter=6.3*2.5mm^2, http://cdn-reichelt.de/documents/datenblatt/B400/1_4W%23YAG.pdf", Reference=L1, Footprint=User6502:R_TH_0.25W_P14, Description="Inductor with ferrite core", ki_fp_filters="Choke_* *Coil* Inductor_* L_*"
Un56: library part TO-220_H, "TO-220-3, Horizontal, RM 2.54mm, see https://www.vishay.com/docs/66542/to-220-1.pdf", Reference=U1, Footprint=User6502:TO-220_H, Datasheet=http://www.st.com/content/ccc/resource/technical/document/datasheet/41/4f/b3/b0/12/d4/47/88/CD00000444.pdf/files/CD00000444.pdf/jcr:content/translations/en.CD00000444.pdf, Description="Positive 1.5A 35V Linear Regulator, Fixed Output 5V, TO-220/TO-263/TO-252", ki_fp_filters="TO?252* TO?263* TO?220*"
Un59: library part LQFP-32_7x7mm_P0.8mm_LongPad, "LQFP, 32 Pin (https://www.nxp.com/docs/en/package-information/SOT358-1.pdf), generated with kicad-footprint-generator ipc_gullwing_generator.py", Reference=U2, Footprint=User6502:LQFP-32_7x7mm_P0.8mm_LongPad, Datasheet=http://www.st.com/st-web-ui/static/active/en/resource/technical/document/datasheet/DM00024550.pdf, Description="16MHz, 8K Flash, 1K RAM, 128 EEPROM, LQFP-32", ki_fp_filters=LQFP*7x7mm*P0.8mm*

## Via types
v1: diameter 2.8, hole 1, F.Cu to B.Cu, tented both sides, 2 vias
v2: diameter 2.4, hole 0.8, F.Cu to B.Cu, tented both sides, 2 vias

## Nets (pads, with @x,y where several pads share a name; then routed paths per layer and width w, separated by ;. In a path a pad name is that pad's centre, name@x,y a point inside that pad or via, vN(x,y) a via of type N, cw(c..) or ccw(c..) an arc to the next point about the centre after c; other vN are vias at no path point)
+5V: Un0.8 Un7.1 Un18.1 Un20.3 Un23.1 Un25.1 Un28.3 Un32.1 Un35.1 Un44.1 Un51.3 Un56.3 Un59.6 | length 214.9
  F.Cu w1.4: v2(188.15,94.8) 188.15,89.625 185.3,86.775 185.3,83.35 v2(190.15,78.5)
  B.Cu w0.5: 134.5,108.35 134.5,103.9 135.2,103.2 Un59.6@136.725,103.2
  B.Cu w1.4: Un56.3 Un23.1 115.45,106.35 117.5,108.4 Un18.1 ; 119.15,108.35 134.5,108.35 135.5,109.35 Un28.3 135.5,113.85 137.1,115.45 171.5,115.45 ; Un20.3 171.08,115.03 171.5,115.45 ; Un25.1 Un32.1 ; 173.25,72.35 173.67,71.93 190.055,71.93 ; Un44.1 179.83,104.18 Un51.3 179.83,115.12 179.5,115.45 ; Un0.8@184.99,61.07 Un7.1 ; Un35.1 189.805,68.7 ; v2(188.15,94.8) 188.15,109.95 182.65,115.45 179.5,115.45 ; Un7.1@190.15,61.228 v2(190.15,78.5) ; 171.5,115.45 179.5,115.45
+9V: Un2.2 Un3.1 Un11.1 Un34.1 Un36.2 Un50.1 Un56.1 | length 86.6
  B.Cu w0.7: 103.35,65.35 110.5,65.35
  B.Cu w1.4: Un3.1 100.25,91.45 101.9,89.8 101.9,83.6 102.85,82.65 Un50.1 ; Un56.1 Un50.1 ; Un2.2 104,57.85 102.3,59.55 102.3,64.3 103.35,65.35 103.45,65.45 Un11.1 103.45,75.9 104.8,77.25 Un50.1 ; 110.5,65.35 113.5,65.35 ; Un34.1 115.4,71.35 113.5,69.45 113.5,65.35 ; Un36.2 122.95,57.85 115.45,65.35 113.5,65.35
CAP_DISCHARGE: Un16.2 Un59.23 | length 10.7
  B.Cu w0.5: Un59.23 146.55,100 147.55,99 147.55,97.07 Un16.2
CAP_SLOW_CHG: Un12.2 Un59.22 | length 8.4
  B.Cu w0.5: Un59.22 147.408,100.8 Un12.2
Cx: Un2.3 Un4.2 Un12.1 Un19.2 Un37.1 Un46.1 | length 130.4
  F.Cu w1.4: v1(132.5,71.35) 140.4,71.35 143.05,74 143.05,96.65 149.2,102.8 v1(159.4,102.8)
  B.Cu w1.4: Un2.3 120.9,54.9 127.45,54.9 132.5,59.95 v1(132.5,71.35) ; Un12.1 160.463,96.287 159.4,97.35 v1(159.4,102.8) 159.4,107.95 160.45,109 Un37.1 ; Un12.1@162.083,96.29 Un4.2 174.46,98.35 178.55,98.35 184,103.8 Un46.1
Cx_ADC: Un37.2 Un59.16 | length 9.8
  B.Cu w0.5: Un59.16 143.7,107.45 145.25,109 Un37.2
F_IN: Un36.4 Un47.1 | length 7.6
  B.Cu w1.4: Un36.4 Un47.1
F_OUT: Un14.2 Un59.18 | length 26.9
  B.Cu w0.5: Un59.18 149.75,104 150.3,103.45 154.8,103.45 157.1,101.15 157.1,97.85
  B.Cu w1.4: 157.1,97.85 157.1,89.64 Un14.2
GND: Un0.4 Un0.5 Un5.3 Un7.2 Un10.3 Un13.2 Un15.3 Un17.3 Un18.2 Un21.2 Un23.2 Un27.2 Un28.4 Un29.2 Un31.1 Un33.2 Un38.2 Un40.2 Un41.2 Un48.3 Un50.2 Un52.2 Un53.2 Un55.2 Un56.2 Un58.2 Un59.4 | length 13.7
  B.Cu w0.5: 127.3,101.6 136.725,101.6 141,101.6
LCD_SCL: Un28.1 Un59.12 | length 5.4
  B.Cu w0.5: Un59.12@140.5,106.175 Un28.1
LCD_SDA: Un28.2 Un59.11 | length 6.1
  B.Cu w0.5: Un28.2 138,109.45 139.7,107.75 Un59.11@139.7,106.175
Lx: Un36.3 Un49.1 | length 8.5
  B.Cu w1.4: Un36.3 135.75,60.25 137.857,62.357 Un49.1@140.96,62.357
Lx_OUT: Un1.2 Un59.19 | length 30
  B.Cu w0.5: Un59.19 148.75,103.2 149.75,102.2 153.6,102.2 154.75,101.05 154.75,97.7
  B.Cu w1.4: 154.75,97.7 154.75,87.11 Un1.2
Net-(C1-Pad1): Un24.1 Un47.2 | length 20.2
  B.Cu w1.4: Un47.2 157.75,67.85 161.3,71.4 164.8,71.4 166.55,73.15 Un24.1
Net-(C8-Pad2): Un49.2 Un52.1 Un54.2 | length 8.9
  B.Cu w1.4: Un49.2 158.975,62.357 ; Un52.1@158.975,58.652 158.975,62.357 ; Un54.2 158.975,62.357
Net-(D1-A): Un3.2 Un40.1 | length 12.7
  B.Cu w1.4: Un3.2 100.25,107.6 102.5,109.85 105.15,109.85 106.35,111.05 Un40.1@106.35,114.05
Net-(D2-A): Un15.1 Un34.2 Un36.5 | length 6.6
  B.Cu w1.4: Un34.2 Un15.1@125.42,74.53 ; Un36.5 Un34.2@125.45,71.32
Net-(D3-K): Un10.2 Un24.2 Un41.1 Un57.1 | length 19.9
  B.Cu w1.4: Un24.2 Un41.1 Un10.2@175.55,82.94 ; Un10.2 175.54,85.64 177.75,87.85 Un57.1
Net-(D4-A): Un2.5 Un11.2 Un48.1 | length 10
  B.Cu w1.4: Un2.5 Un11.2@111.07,71.27 ; Un11.2 111.07,73.62 112.01,74.56 Un48.1
Net-(J2-Pin_2): Un2.1 Un31.2 | length 54.4
  B.Cu w1.4: Un2.1 107.95,62.85 118.4,52.4 135.15,52.4 140.8,58.05 146.5,58.05 148.83,55.72 Un31.2
Net-(J3-Pin_1): Un6.1 Un9.1 | length 4.4
  B.Cu w1.4: Un6.1 Un9.1@160.7,112.3
Net-(Q1-C): Un10.1 Un14.1 Un44.2 Un57.2 | length 14
  B.Cu w1.4: Un14.1 169.05,87.85 Un57.2@172.68,87.85 ; Un10.1 Un57.2@173,87.59 ; Un57.2@173.2,87.85 176.89,91.54 Un44.2
Net-(Q2-B): Un15.2 Un26.1 | length 4.6
  B.Cu w1.4: Un15.2 128.71,77.09 Un26.1@129.65,76.15
Net-(Q3-B): Un30.2 Un48.2 | length 10.1
  B.Cu w1.4: Un48.2 117,77.1 119.64,79.74 Un30.2
Net-(Q4-B): Un39.1 Un51.2 | length 21.9
  B.Cu w1.4: Un39.1 170.85,99.95 177.29,106.39 Un51.2@177.29,110.35
Net-(Q4-C): Un4.1 Un51.1 | length 5.1
  B.Cu w1.4: Un4.1 174.75,108.8 Un51.1
Net-(Q5-B): Un20.2 Un42.1 | length 14.9
  B.Cu w1.4: Un42.1 164.4,103.3 167.7,103.3 169.3,104.9 169.3,107.44 168.54,108.2 Un20.2
Net-(Q5-C): Un19.1 Un20.1 | length 4.2
  B.Cu w1.4: Un19.1 Un20.1
Net-(Q6-B): Un16.1 Un17.2 | length 22.7
  B.Cu w1.4: Un16.1 173.375,92.7 175.435,94.76 Un17.2
Net-(Q6-C): Un17.1 Un46.2 | length 2.4
  B.Cu w1.4: Un17.1 Un46.2@183.95,99.69
Net-(R11-Pad2): Un0.1 Un1.1 Un22.2 Un35.2 Un43.2 | length 35.1
  B.Cu w1.4: Un22.2 169,65.1 ; Un1.1 169,65.1 ; Un43.2@176.925,64.92 Un35.2@176.925,68.685 ; Un0.1 176.9,61.5 Un43.2 169.205,64.895 169,65.1
Net-(REL1-Pad1): Un2.4 Un36.1 | length 7.1
  B.Cu w1.4: Un2.4 Un36.1
Net-(U2-NRST): Un55.1 Un59.1 | length 15.6
  B.Cu w0.5: Un55.1 130.5,88.4 136.4,94.3 Un59.1
Net-(U2-PA1): Un45.2 Un53.1 Un59.2 | length 16
  B.Cu w0.5: Un45.2 133.27,93.92 134.35,95 134.35,99.15 135.2,100 Un59.2@136.725,100
  B.Cu w1.4: Un53.1@125.65,93.92 Un45.2
Net-(U2-PA2): Un27.1 Un45.1 Un59.3 | length 11.9
  B.Cu w0.5: Un45.1 132.45,98.8 134.45,100.8 Un59.3@136.725,100.8
  B.Cu w1.4: Un27.1@125.63,98.8 Un45.1
Net-(U2-PB2): Un6.2 Un59.14 | length 7.5
  B.Cu w0.5: Un59.14 142.1,108.2 Un6.2@146.19,112.29
Net-(U2-PC7): Un13.1 Un21.1 Un32.2 Un59.24 | length 41.4
  B.Cu w0.5: Un59.24 145.4,96.4 148.4,93.4 148.4,92.05 151.15,89.3
  B.Cu w1.4: 151.15,89.3 152.1,88.35 152.1,85.8 153.5,84.4 153.5,78.75 151.7,76.95 Un13.1 ; 153.8,78.85 Un21.1 161.25,78.85 163.09,77.01 Un32.2
Net-(U2-VCAP): Un33.1 Un59.5 | length 7
  B.Cu w0.5: Un33.1 132.5,104.35 134.45,102.4 Un59.5@136.725,102.4
Net-(U3A-+): Un0.3 Un22.1 Un25.2 Un38.1 Un54.1 | length 29.3
  B.Cu w1.4: Un54.1 161.475,67.035 Un25.2 ; Un54.1@161.585,63.68 Un38.1 164.9,59.95 168.86,55.99 Un0.3@177.33,55.99 ; 168.75,56.1 169,55.85 Un22.1
Net-(U3A--): Un0.2 Un43.1 Un58.1 | length 18.7
  B.Cu w1.4: Un58.1@172.78,58.53 Un0.2@177.33,58.53 ; Un0.2 179.81,58.51 181.35,60.05 181.35,63.05 183.195,64.895 Un43.1
Net-(U3B--): Un0.6 Un0.7 | length 2.5
  B.Cu w1.4: Un0.6 Un0.7
RL1: Un26.2 Un59.27 | length 25.3
  B.Cu w0.5: Un59.27 142.1,95 144.55,92.55 144.55,90 145.35,89.2 145.35,86.15
  B.Cu w1.4: Un26.2 145.35,81.34 145.35,86.15
RL2: Un30.1 Un59.28 | length 30.8
  B.Cu w0.5: Un59.28 141.3,93.85 143.05,92.1 143.05,86
  B.Cu w1.4: Un30.1 132.35,80.05 140.2,80.05 143.05,82.9 143.05,86
SWIM: Un29.1 Un59.26 | length 14.1
  B.Cu w0.5: Un59.26 142.9,96.2 146.45,92.65 146.45,91 149.05,88.4 Un29.1
UART_RX: Un5.2 Un59.31 | length 12
  B.Cu w0.5: Un5.2 137.86,94.81 138.9,95.85 Un59.31
UART_TX: Un5.1 Un59.30 | length 11.9
  B.Cu w0.5: Un59.30 139.7,93.25 140.4,92.55 Un5.1
unconnected-(U2-PA3-Pad7): Un59.7
unconnected-(U2-PB1-Pad15): Un59.15
unconnected-(U2-PB3-Pad13): Un59.13
unconnected-(U2-PB6-Pad10): Un59.10
unconnected-(U2-PB7-Pad9): Un59.9
unconnected-(U2-PC3-Pad20): Un59.20
unconnected-(U2-PD0-Pad25): Un59.25
unconnected-(U2-PD4-Pad29): Un59.29
unconnected-(U2-PD7-Pad32): Un59.32
unconnected-(U2-PF4-Pad8): Un59.8
{\C\A\P\_\F\A\S\T\_\C\H\G\}\: Un42.2 Un59.17 | length 6.9
  B.Cu w0.5: Un59.17 146.25,104.8 147.05,105.6 Un42.2
{\C\A\P\_\M\_\C\H\G\}\: Un39.2 Un59.21 | length 7.2
  B.Cu w0.5: Un59.21 148.5,101.6 150.15,99.95 Un39.2
pads on no net: Un56.Un1
copper on no net: | length 1.6
  B.Cu w0.254: 135.75,98.1 ccw(c135.5,98.1) 135.75,98.1

## Polygon pours and split planes (outlines as drawn)
Net-(U2-PC7) on B.Cu "B.Cu-Net-(U2-PC7)-1" (solid, remove dead copper, pour order 30043): 150.337,90.467 149.983,90.113 150.503,89.032 151.151,89.299 151.418,89.947
GND on B.Cu "B.Cu-GND" (solid, remove dead copper, pour order 30060): 96.25,120.85 195.75,120.85 195.75,46.35 96.25,46.35
Net-(U2-VCAP) on B.Cu "B.Cu-Net-(U2-VCAP)" (solid, remove dead copper, pour order 30042): 132.394,104.103 132.747,104.456 130.968,105.335 130.499,104.351 130.924,103.335
CAP_SLOW_CHG on B.Cu "B.Cu-CAP_SLOW_CHG" (solid, remove dead copper, pour order 30039): 150.586,97.975 150.232,97.622 150.827,95.967 151.921,96.287 152.12,97.42
+9V on B.Cu "B.Cu-+9V-5" (solid, remove dead copper, pour order 30050): 104.75,65 104.75,65.7 103.618,65.997 103.349,65.35 103.618,64.703
Cx_ADC on B.Cu "B.Cu-Cx_ADC" (solid, remove dead copper, pour order 30033): 149.79,109.25 149.79,108.75 151.365,108.004 151.941,109 151.365,109.996
RL1 on B.Cu "B.Cu-RL1-1" (solid, remove dead copper, pour order 30058): 145.6,87.55 145.1,87.55 144.703,86.418 145.35,86.149 145.997,86.418
+9V on B.Cu "B.Cu-+9V-4" (solid, remove dead copper, pour order 30052): 109.1,65.7 109.1,65 110.232,64.703 110.501,65.35 110.232,65.997
Net-(U2-PA2) on B.Cu "B.Cu-Net-(U2-PA2)" (solid, remove dead copper, pour order 30027): 132.45,98.55 132.45,99.05 130.897,99.8 130.249,98.8 130.897,97.8
+9V on B.Cu "B.Cu-+9V-3" (solid, remove dead copper, pour order 30051): 104.75,65 104.75,65.7 103.618,65.997 103.349,65.35 103.618,64.703
+9V on B.Cu "B.Cu-+9V-2" (solid, remove dead copper, pour order 30031): 109.1,65.7 109.1,65 110.232,64.703 110.501,65.35 110.232,65.997
{\C\A\P\_\F\A\S\T\_\C\H\G\}\ on B.Cu "B.Cu-~{CAP_FAST_CHG}" (solid, remove dead copper, pour order 30035): 149.79,105.85 149.79,105.35 151.365,104.604 151.941,105.6 151.365,106.596
UART_RX on B.Cu "B.Cu-UART_RX" (solid, remove dead copper, pour order 30045): 138.11,87.958 137.61,87.958 136.977,86.351 137.86,85.899 138.743,86.351
RL1 on B.Cu "B.Cu-RL1" (solid, remove dead copper, pour order 30041): 145.6,87.55 145.1,87.55 144.703,86.418 145.35,86.149 145.997,86.418
Lx_OUT on B.Cu "B.Cu-Lx_OUT-1" (solid, remove dead copper, pour order 30056): 155,99.1 154.5,99.1 154.103,97.968 154.75,97.699 155.397,97.968
+5V on B.Cu "B.Cu-+5V-3" (solid, remove dead copper, pour order 30054): 134.25,106.95 134.75,106.95 135.147,108.082 134.5,108.351 133.853,108.082
{\C\A\P\_\M\_\C\H\G\}\ on B.Cu "B.Cu-~{CAP_M_CHG}" (solid, remove dead copper, pour order 30044): 150.037,100.417 149.683,100.063 151.218,99.035 151.891,99.949 151.315,100.946
F_OUT on B.Cu "B.Cu-F_OUT" (solid, remove dead copper, pour order 30055): 157.35,99.25 156.85,99.25 156.453,98.118 157.1,97.849 157.747,98.118
RL2 on B.Cu "B.Cu-RL2-1" (solid, remove dead copper, pour order 30057): 143.3,87.4 142.8,87.4 142.403,86.268 143.05,85.999 143.697,86.268
CAP_DISCHARGE on B.Cu "B.Cu-CAP_DISCHARGE" (solid, remove dead copper, pour order 30040): 150.586,94.388 150.232,94.034 150.827,92.379 151.921,92.699 152.12,93.833
RL2 on B.Cu "B.Cu-RL2" (solid, remove dead copper, pour order 30038): 143.3,87.4 142.8,87.4 142.403,86.268 143.05,85.999 143.697,86.268
+5V on B.Cu "B.Cu-+5V-2" (solid, remove dead copper, pour order 30034): 134.25,106.95 134.75,106.95 135.147,108.082 134.5,108.351 133.853,108.082
+9V on B.Cu "B.Cu-+9V-1" (solid, remove dead copper, pour order 30026): 104.75,65 104.75,65.7 103.618,65.997 103.349,65.35 103.618,64.703
Net-(U2-PC7) on B.Cu "B.Cu-Net-(U2-PC7)" (solid, remove dead copper, pour order 30059): 150.337,90.467 149.983,90.113 150.503,89.032 151.151,89.299 151.418,89.947
SWIM on B.Cu "B.Cu-SWIM" (solid, remove dead copper, pour order 30049): 149.3,87.7 148.8,87.7 148.15,86.8 149.05,85.899 149.95,86.8
+9V on B.Cu "B.Cu-+9V" (solid, remove dead copper, pour order 30029): 104.75,65 104.75,65.7 103.618,65.997 103.349,65.35 103.618,64.703
+5V on B.Cu "B.Cu-+5V-1" (solid, remove dead copper, pour order 30053): 134.25,106.95 134.75,106.95 135.147,108.082 134.5,108.351 133.853,108.082
+5V on B.Cu "B.Cu-+5V" (solid, remove dead copper, pour order 30032): 134.25,106.95 134.75,106.95 135.147,108.082 134.5,108.351 133.853,108.082
Net-(U2-NRST) on B.Cu "B.Cu-Net-(U2-NRST)" (solid, remove dead copper, pour order 30037): 130.25,88.15 130.25,88.65 128.595,89.4 128.149,88.4 128.595,87.4
LCD_SCL on B.Cu "B.Cu-LCD_SCL" (solid, remove dead copper, pour order 30046): 140.25,109.425 140.75,109.425 141.355,110.459 140.5,111.601 139.645,110.459
Lx_OUT on B.Cu "B.Cu-Lx_OUT" (solid, remove dead copper, pour order 30036): 155,99.1 154.5,99.1 154.103,97.968 154.75,97.699 155.397,97.968
Net-(U2-PB2) on B.Cu "B.Cu-Net-(U2-PB2)" (solid, remove dead copper, pour order 30030): 144.508,110.961 144.861,110.608 146.523,111.216 146.191,112.301 145.096,112.618
UART_TX on B.Cu "B.Cu-UART_TX" (solid, remove dead copper, pour order 30047): 140.65,87.975 140.15,87.975 139.5,87.075 140.4,85.899 141.3,87.075
Net-(U2-PA1) on B.Cu "B.Cu-Net-(U2-PA1)" (solid, remove dead copper, pour order 30028): 132.45,93.67 132.45,94.17 130.897,94.92 130.249,93.92 130.897,92.92
LCD_SDA on B.Cu "B.Cu-LCD_SDA" (solid, remove dead copper, pour order 30048): 137.829,109.267 138.183,109.621 138.728,110.689 137.999,111.601 137.142,111.004

## Keep-outs
B.Cu:
  region: 150.959,61.849 145.459,61.849 145.459,62.865 150.959,62.865
  region: 132.25,95.35 126.75,95.35 126.75,97.6 132.25,97.6
Edge.Cuts:
  circle w0.254: c101,51.1 r1.5
  circle w0.254: c191,51.1 r1.5
  circle w0.254: c188.25,85.1 r1.5
  circle w0.254: c188.25,116.1 r1.5
  circle w0.254: c113.25,85.141 r1.501
  circle w0.254: c113.25,116.141 r1.501
  circle w0: c113.25,116.141 r1.501
  lines w0: 96,46.1 196,46.1 196,121.1 96,121.1 96,46.1
  lines w0.254: 96,46.1 196,46.1 196,121.1 96,121.1 96,46.1

## Other copper
B.Cu:
  region: 135.598,98.335 135.68,98.28 135.735,98.198 135.755,98.1 135.735,98.002 135.68,97.92 135.598,97.865 135.5,97.845 135.402,97.865 135.32,97.92 135.265,98.002 135.245,98.1 135.265,98.198 135.32,98.28 135.402,98.335 135.5,98.355
  text "LC_S8" at 127.508,112.014 h3
  text "Electronic6502" at 193.294,111.76 h3 r90
  text "V1.0" at 180.848,74.041 h2.5
  text "5 Oct / 2025" at 112.395,49.276 h2.5

## Silkscreen, mask and mechanical layers (free items; w line width, h text height)
F.SilkS:
  text "GND" at 101.6,118.11 h1.6
  text "+" at 106.299,117.856 h2.5
  text "GND" at 133.477,115.951 h1.4 r90
  text "+5V" at 135.89,115.951 h1.4 r90
  text "SDA" at 138.557,115.951 h1.4 r90
  text "SCL" at 140.97,115.951 h1.4 r90
  text "VBAT" at 158.496,114.681 h2
  text "TX" at 141.699,90.1 h1.4 r90
  text "GND" at 136.714,89.85 h1.4 r90
  text "RX" at 139.199,89.85 h1.4 r90
  text "5 October 2025" at 193.04,89.027 h2.3 r90
  text "SWIM" at 151.384,85.344 h1.4
  text "GND" at 151.511,82.931 h1.4
  text "LC+Frequency Meter" at 111.379,51.054 h3
  text "by : Electronic 6502" at 156.591,49.149 h3

## Text inside footprints (layer, text, board x,y; h text height)
Un3: F.Fab "K" at 98.47,94.985 h1 r90
Un11: F.Fab "K" at 103.185,72.73 h1
Un34: F.Fab "K" at 117.535,72.78 h1
Un41: F.Fab "K" at 175.285,79.58 h1